# EAGLE board V0p2_Main_PCB2 (EAGLE 7.1.0)
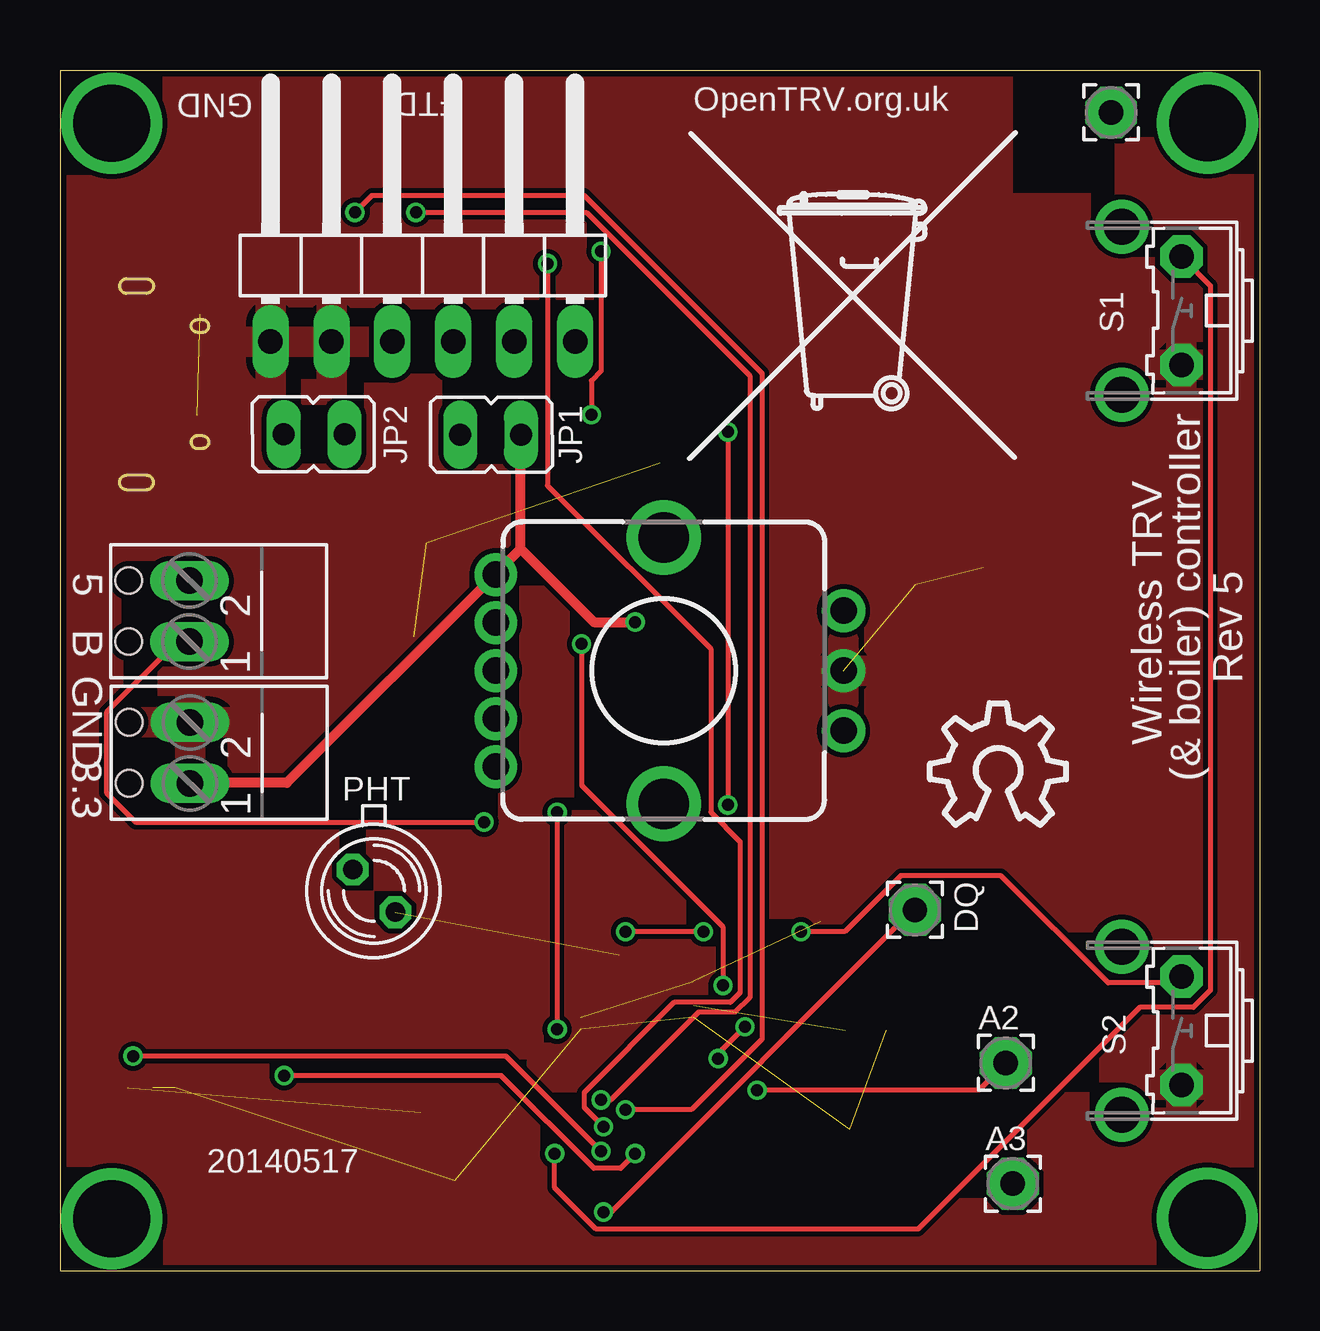
[diagram p0: board, top side]
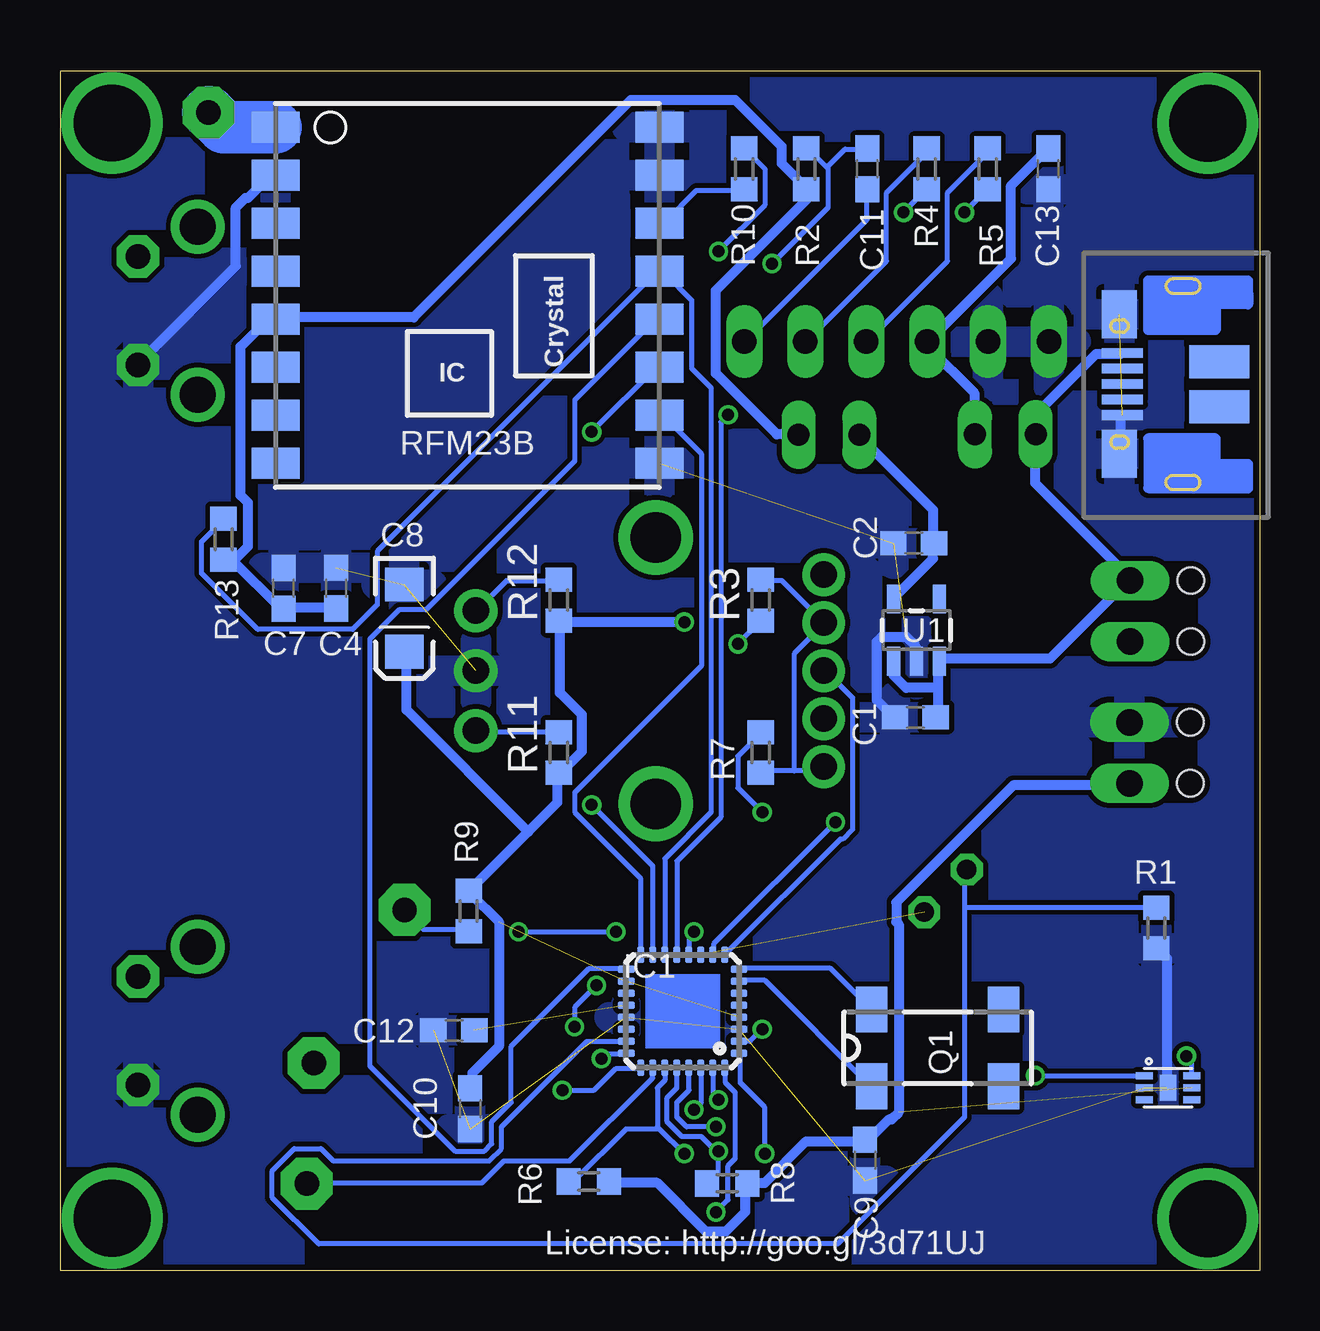
[diagram p1: board, bottom side, seen from below]

Size 50 x 50 mm. Coordinates in mm from the lower left corner, seen from the top.
Outline: 0,0 50,0 50,50 0,50 0,0
Copper layers (1*16): Top 0.035mm / dielectric 1.5mm / Bottom 0.035mm
Design rules "PMServicesStd *": minimum track width 8mil, minimum drill 0.5mm, track to track 8mil, track to pad 8mil, pad to pad 8mil, via to via 8mil, smd to smd 0mil, copper to edge 10mil, drill to drill 10mil, minimum pad ring 10mil, minimum via ring 6mil, stop-mask expansion 2mil, vias tented up to drill 100mil, thermal gap 10mil
Net classes: 0 default: width 0.203 mm; 1 supply: width 0.406 mm, clearance 0.203 mm; 2 ant: width 2.184 mm

## Footprints (pad centres in the part's own frame; a part is rotated, then mirrored left to right if it is on the bottom)
2,15/1,0 = drill 1.016 pad 2.159 octagon: 1 0,0
C0603 = smd 1.1 x 1: 1 -0.85,0; 2 0.85,0
EIA3216 = smd 1.4 x 1.6: A 1.4,0; C -1.4,0
1X06/90 = drill 1.016 long: 1 -6.35,-3.81; 2 -3.81,-3.81; 3 -1.27,-3.81; 4 1.27,-3.81; 5 3.81,-3.81; 6 6.35,-3.81
MLF32 = smd 0.7 x 0.3: 1 -2.35,1.75; 2 -2.35,1.25; 3 -2.35,0.75; 4 -2.35,0.25; 5 -2.35,-0.25; 6 -2.35,-0.75; 7 -2.35,-1.25; 8 -2.35,-1.75; 17 2.35,-1.75; 18 2.35,-1.25; 19 2.35,-0.75; 20 2.35,-0.25; 21 2.35,0.25; 22 2.35,0.75; 23 2.35,1.25; 24 2.35,1.75 | smd 0.3 x 0.7: 9 -1.75,-2.35; 10 -1.25,-2.35; 11 -0.75,-2.35; 12 -0.25,-2.35; 13 0.25,-2.35; 14 0.75,-2.35; 15 1.25,-2.35; 16 1.75,-2.35; 25 1.75,2.35; 26 1.25,2.35; 27 0.75,2.35; 28 0.25,2.35; 29 -0.25,2.35; 30 -0.75,2.35; 31 -1.25,2.35; 32 -1.75,2.35
JP1 = drill 0.914 long: 1 0,-1.27; 2 0,1.27
BPX65 = drill 0.813 octagon: A -0.889,-0.889; K 0.889,0.889
MC-306 = smd 1.3 x 1.9: 1 -2.75,-1.6; 2 2.75,-1.6; 3 2.75,1.6; 4 -2.75,1.6
R0603 = smd 1 x 1.1: 1 -0.85,0; 2 0.85,0
RFM23-XXX-S1 = smd 2 x 1.3: 1 -8,7; 2 -8,5; 3 -8,3; 4 -8,1; 5 -8,-1; 6 -8,-3; 7 -8,-5; 8 -8,-7; 9 8,-7; 10 8,-5; 11 8,-3; 12 8,-1; 13 8,1; 14 8,3; 15 8,5; 16 8,7
B3F-31XX = drill 1.016 pad 1.778 octagon: 1 -2.261,-1.245; 2 2.261,-1.245 | drill 1.499 pad 2.032: 3 -3.505,1.245; 4 3.505,1.245
ENCODER_LED_3 = drill 1.1 pad 1.778: 1 -4,7; 2 -2,7; 3 0,7; 4 2,7; 5 4,7 | drill 1.1 pad 1.8: A -2.5,-7.5; B 2.5,-7.5; C 0,-7.5 | drill 2.1: M1 -5.55,0; M2 5.55,0
TC1185 = smd 0.55 x 1.2: 1 -0.95,-1.3; 2 0,-1.3; 3 0.95,-1.3; 4 0.95,1.3; 5 -0.95,1.3
SHT21 = smd 0.28 x 0.7: 1 -0.5,-0.988; 2 0,-0.988; 3 0.5,-0.988; 4 0.5,0.988; 5 0,0.988; 6 -0.5,0.988 | smd 1.1 x 0.7: P$1 0,0
MICRO-USB-FCI-10103592 = smd 0.4 x 1.71: 1 3.84,2.51; 2 3.19,2.51; 3 2.54,2.51; 4 1.89,2.51; 5 1.24,2.51 | smd 2 x 1.46: 7 -0.36,2.64; 17 5.44,2.64 | smd 1.375 x 2.5: 11 1.603,-1.52; 12 3.478,-1.52
SCREWTERMINAL = drill 1.1 long: 1 -1.27,-1.27; 2 1.27,-1.27 | hole 1.1: -1.27,1.27; 1.27,1.27

## Placement (x,y rotation side)
A2  [2,15/1,0]  39.42,8.66 0 top
A3  [2,15/1,0]  39.72,3.63 0 top
ANT1  ANT (86 mm)  [2,15/1,0]  43.81,48.26 0 top
C1  10uF 10V  [C0603]  14.35,23.06 180 bottom
C2  10uF 10V  [C0603]  14.41,30.31 0 bottom
C4  100pF  [C0603]  38.49,28.44 270 bottom
C7  100nF  [C0603]  40.69,28.43 90 bottom
C8  100uF  [EIA3216]  35.65,27.19 270 bottom
C9  100nF  [C0603]  16.44,4.6 270 bottom
C10  100nF  [C0603]  32.91,6.75 270 bottom
C11  100nF  [C0603]  16.35,45.91 270 bottom
C12  100nF  [C0603]  33.58,10.02 180 bottom
C13  10uF 10V  [C0603]  8.8,45.91 90 bottom
DQ  [2,15/1,0]  35.64,15.03 0 top
FTDI  [1X06/90]  15.12,42.52 0 top
IC1  ATMEGA328-AU  [MLF32]  24.05,10.81 180 bottom
JP1  [JP1]  17.95,34.83 270 top
JP2  [JP1]  10.59,34.85 90 top
PHT  BPX65  [BPX65]  13.09,15.82 270 top
Q1  32768Hz  [MC-306]  13.41,9.28 0 bottom
R1  100K  [R0603]  4.3,14.28 270 bottom
R2  10K  [R0603]  18.89,45.91 90 bottom
R3  470R  [R0603]  20.79,27.94 90 bottom
R4  10K  [R0603]  13.87,45.91 90 bottom
R5  10K  [R0603]  11.33,45.91 90 bottom
R6  4K7  [R0603]  27.96,3.71 180 bottom
R7  470R  [R0603]  20.79,21.59 270 bottom
R8  4K7  [R0603]  22.19,3.63 0 bottom
R9  4.7K  [R0603]  32.96,14.99 90 bottom
R10  1K  [R0603]  21.48,45.91 270 bottom
R11  10K  [R0603]  29.21,21.59 90 bottom
R12  10K  [R0603]  29.21,27.94 90 bottom
R13  47K  [R0603]  43.18,30.48 270 bottom
RFM23B  RFM23B  [RFM23-XXX-S1]  33.02,40.64 0 bottom
S1  [B3F-31XX]  45.5,40 90 top
S2  [B3F-31XX]  45.5,10 90 top
SW1  [ENCODER_LED_3]  25.16,25 90 top
U1  TC1185SMD  [TC1185]  14.3,26.69 0 bottom
U$1  [OSHW_10X200_NOTEXT]  36.26,18.57 0 top
U$2  [TONNE]  32.88,37.88 0 top
U$4  SHT21  [SHT21]  3.81,7.62 270 bottom
USBPOWER  MICRO-USB-FCI-10103592  [MICRO-USB-FCI-10103592]  3.2,34.4 90 bottom
X1  [SCREWTERMINAL]  4.13,27.48 90 top
X2  [SCREWTERMINAL]  4.15,21.57 90 top

## Library data of the parts
A2 A3 ANT1 DQ = wirepad
C1 C2 C4 C7 C9-C13 R1-R13 = resistor
C8 = SparkFun-Passives
FTDI = pinhead
IC1 = Arduino-AVR
JP1 JP2 = jumper
PHT = opto-trans-siemens; MPN: BPX65.; OC_FARNELL: 327451; OC_NEWARK: 06WX2764
Q1 = crystal; MPN: MC-306 60.0KHZ 100PPM ,12.5PF; OC_FARNELL: 1278040; OC_NEWARK: 31M5576
RFM23B = SparkFun-RF
S1 S2 = adafruit
SW1 = SparkFun-Electromechanical
U1 = 3.3VREG
U$1 = ohw-logo
U$2 = logo
U$4 = SHT21
USBPOWER = micro-usb-fci-10103592
X1 X2 = screwterminal; MPN: 237-102; OC_FARNELL: unknown; OC_NEWARK: 70K9898

## Nets
5V [supply]: C1.1 JP2.2 U1.1 U1.3 USBPOWER.1 X1.2
BOILER: IC1.10 X1.1
BUTTON_LEARN2_L: IC1.1 S1.2
BUTTON_LEARN_L: IC1.12 S2.2
BUTTON_MODE_L: IC1.9 SW1.3
D2: DQ.1 IC1.32 R9.1
ENC_A: R11.2 SW1.A
ENC_B: R12.2 SW1.B
GND [supply]: C1.2 C2.1 C4.1 C7.2 C8.C C9.2 C10.2 C12.2 C13.1 FTDI.1 FTDI.2 IC1.3 IC1.21 R1.2 RFM23B.2 RFM23B.9 RFM23B.15 RFM23B.16 S1.1 S2.1 SW1.C U1.2 U$4.2 U$4.P$1 USBPOWER.5 USBPOWER.7 USBPOWER.17 X2.2
GND2: IC1.5
IO_POWER_UP [supply]: IC1.11 PHT.K
LDR: IC1.23 PHT.A R1.1
LED_HEATCALL_B: IC1.24 R3.1
LED_HEATCALL_R: IC1.2 R7.1
N$1: C11.2 FTDI.6
N$3: FTDI.4 R5.2
N$5: FTDI.5 R4.2
N$6 [supply]: C12.1 IC1.20
N$7: R10.2 RFM23B.14
N$8 [supply]: C2.2 JP1.1 U1.5
N$11 [supply]: C13.2 FTDI.3 JP2.1
N$13: R3.2 R7.2 SW1.1 SW1.4
N$24: A2.1 IC1.25
N$25: A3.1 IC1.26
N$31 [ant]: ANT1.1 RFM23B.1
RESET: C11.1 IC1.29 R2.2
RFM_IRQ: IC1.13 R10.1
RX: IC1.31 R4.1
SCL: IC1.28 R8.1 U$4.6
SDA: IC1.27 R6.2 U$4.1
SPI_MISO: IC1.16 RFM23B.10
SPI_MOSI: IC1.15 RFM23B.11
SPI_NSS: IC1.14 R13.1 RFM23B.13
SPI_SCK: IC1.17 RFM23B.12
TX: IC1.30 R5.1
VCC [supply]: C4.2 C7.1 C8.A C9.1 C10.1 IC1.4 IC1.18 JP1.2 R2.1 R6.1 R8.2 R9.2 R11.1 R12.1 R13.2 RFM23B.5 SW1.5 U$4.5 X2.1
VCC2: IC1.6
XTAL1: IC1.7 Q1.1
XTAL2: IC1.8 Q1.4

## Tracks (layer width: path | path; a pad name or v marks a point on that pad's centre or on a via)
5V
  Bottom 0.406: USBPOWER.1 5.79,38.2 6.81,38.2 9.25,35.76 9.25,34.85 JP2.2 9.35,34.65 9.35,32.82 5.49,28.96 X1.2 5.49,28.75 8.74,25.5 13.21,25.5 U1.3 13.41,25.3 13.41,24.28 | 13.41,24.28 13.41,23.06 C1.1 | 13.41,24.28 14.73,24.28 15.24,24.79 15.24,25.3 U1.1
BOILER  (via drill 0.5)
  Top 0.203: v17.68,18.69 3.15,18.69 1.93,19.91 1.93,23.27 4.88,26.21 5.38,26.21 X1.1
  Bottom 0.203: v17.68,18.69 22.76,13.61 22.76,13.21 IC1.10
BUTTON_LEARN2_L  (via drill 0.5)
  Top 0.203: v20.62,4.88 20.62,3.45 22.35,1.73 35.76,1.73 45.01,10.97 47.24,10.97 47.95,11.68 47.95,41.05 46.84,42.16 S1.2
  Bottom 0.203: v20.62,4.88 20.62,6.81 21.64,7.82 21.64,9.04 IC1.1
BUTTON_LEARN_L  (via drill 0.5)
  Top 0.203: v26.82,14.12 v23.57,14.12 | v30.89,14.12 32.72,14.12 35.05,16.46 39.22,16.46 43.69,11.99 46.53,11.99 46.74,12.19 S2.2
  Bottom 0.203: v23.57,14.12 23.77,13.92 23.77,13.21 IC1.12 | v30.89,14.12 v26.82,14.12
BUTTON_MODE_L
  Bottom 0.203: IC1.9 22.25,13.21 17.48,17.98 17.37,17.98 16.97,18.39 16.97,23.88 18.09,24.99 SW1.3
D2  (via drill 0.5)
  Top 0.203: v22.66,2.44 22.96,2.44 35.56,15.04 DQ.1
  Bottom 0.203: v22.66,2.44 22.15,2.95 22.15,4.37 21.84,4.67 21.84,7.42 22.25,7.82 22.25,8.43 IC1.32 | R9.1 33.02,14.22 34.85,14.22 35.56,14.94 DQ.1
ENC_A
  Bottom 0.203: R11.2 29.26,22.45 32.61,22.45 SW1.A
ENC_B
  Bottom 0.203: R12.2 29.26,28.75 31.39,28.75 32.61,27.53 SW1.B
GND  (11 unrouted)
  Bottom 0.406: 41.05,45.62 RFM23B.2 41.25,45.62 42.16,44.7 42.27,44.7 42.67,44.3 42.67,41.86 46.74,37.8 S1.1 | U$4.P$1 3.86,7.62 3.86,13.01 4.27,13.41 R1.2 | U1.2 14.33,25.4 14.33,26.01 14.73,26.42 15.75,26.42 15.95,26.21 15.95,23.77 15.24,23.06 C1.2 | USBPOWER.5 5.79,35.56 5.79,34.14 USBPOWER.7
  pour Bottom: 0,0 50,0 50,50 44.6,50 44.6,44.28 39.09,44.27 39.09,50 0,50
  pour Top: 0,50 0,0 50,0 50,50 44.6,50 44.6,44.28 39.09,44.27 39.09,50
IO_POWER_UP  (1 unrouted)
LDR
  Bottom 0.203: 12.29,15.14 12.29,16.66 PHT.A | 12.29,15.14 12.29,6.4 17.58,1.12 39.22,1.12 41.15,3.05 41.15,4.17 40.23,5.08 39.12,5.08 38.61,4.57 32.11,4.57 31.6,5.08 31.6,5.99 28.04,9.55 26.42,9.55 IC1.23 | 12.29,15.14 4.37,15.14 R1.1
LED_HEATCALL_B  (via drill 0.5)
  Top 0.203: v27.43,8.84 27.43,9.04 v28.55,10.16 | v27.64,11.89 27.64,14.33 21.74,20.22 v21.74,26.11
  Bottom 0.203: v27.43,8.84 27.23,9.04 26.42,9.04 IC1.24 | v28.55,10.16 28.55,10.97 v27.64,11.89 | v21.74,26.11 20.83,27.03 R3.1
LED_HEATCALL_R  (via drill 0.5)
  Top 0.203: v20.73,19.1 v20.73,10.06
  Bottom 0.203: v20.73,10.06 21.23,9.55 21.64,9.55 IC1.2 | v20.73,19.1 21.74,20.12 21.74,21.44 20.83,22.35 R7.1
N$1
  Bottom 0.203: C11.2 16.36,45.01 16.36,43.79 21.44,38.71 FTDI.6
N$3
  Bottom 0.203: R5.2 11.38,46.74 11.38,46.53 13.01,44.91 13.01,42.06 16.36,38.71 FTDI.4
N$4  (via drill 3.2)
  other vias: 2.16,47.81
N$5
  Bottom 0.203: R4.2 13.92,46.74 13.92,46.53 15.54,44.91 15.54,42.06 18.9,38.71 FTDI.5
N$6  (1 unrouted)
N$7
  Bottom 0.203: R10.2 21.54,45.01 23.47,45.01 24.79,43.69 24.99,43.69 RFM23B.14
N$8
  Bottom 0.406: U1.5 15.24,28.04 13.61,29.67 13.61,30.28 C2.2 13.61,30.48 13.61,31.7 16.66,34.75 JP1.1
N$11
  Bottom 0.406: C13.2 8.84,46.74 10.36,45.21 10.36,42.16 13.82,38.71 FTDI.3 13.82,38.51 11.89,36.58 11.89,34.85 JP2.1
N$12  (via drill 3.2)
  other vias: 47.83,2.19
N$13
  Bottom 0.203: 19.41,20.83 18.29,20.83 18.19,20.93 SW1.1 | 19.41,20.83 20.73,20.83 R7.2 | R3.2 20.73,28.75 19.91,28.75 18.19,27.03 SW1.4 18.19,26.92 19.41,25.7 19.41,20.83
N$19  (via drill 3.2)
  other vias: 47.83,47.82
N$22  (via drill 3.2)
  other vias: 2.16,2.16
N$24  (via drill 0.5)
  Top 0.203: v29.06,7.52 38.3,7.52 39.42,8.64 A2.1
  Bottom 0.203: v29.06,7.52 27.74,7.52 26.82,8.43 25.81,8.43 IC1.25
N$25
  Bottom 0.203: IC1.26 25.3,8.43 25.3,8.03 28.75,4.57 31.5,4.57 32.41,3.66 39.62,3.66 A3.1
N$31
  Bottom 2.184: RFM23B.1 41.05,47.65 43.18,47.65 43.79,48.26 ANT1.1
RESET  (via drill 0.5)
  Top 0.203: v22.66,5.99 21.84,6.81 21.84,7.42 25.6,11.18 27.94,11.18 28.35,11.58 28.35,17.88 27.13,19.1 27.13,25.91 20.32,32.72 v20.32,41.96
  Bottom 0.203: v22.66,5.99 23.88,5.99 24.28,6.4 24.28,7.01 23.77,7.52 23.77,8.43 IC1.29 | v20.32,41.96 17.98,44.3 17.98,45.92 18.03,45.97 | 18.03,45.97 18.8,46.74 R2.2 | 18.03,45.97 17.27,46.74 16.36,46.74 C11.1
RFM_IRQ  (via drill 0.5)
  Top 0.203: v22.15,35.66 22.15,37.08 22.55,37.49 v22.55,42.47
  Bottom 0.203: v22.15,35.66 22.45,35.36 22.45,18.9 24.28,17.07 24.28,13.21 IC1.13 | v22.55,42.47 20.62,44.4 20.62,45.92 21.44,46.74 R10.1
RX  (via drill 0.5)
  Top 0.203: v22.55,7.11 22.96,7.11 26.62,10.77 28.14,10.77 28.75,11.38 28.75,37.29 21.95,44.09 v14.83,44.09
  Bottom 0.203: v22.55,7.11 22.76,7.32 22.76,8.43 IC1.31 | v14.83,44.09 13.92,45.01 R4.1
SCL  (via drill 0.5)
  Top 0.203: v3.05,8.94 18.59,8.94 v22.55,4.98
  Bottom 0.203: v3.05,8.94 2.85,8.74 2.85,8.13 U$4.6 | 22.55,4.88 22.55,4.06 22.96,3.66 R8.1 | 22.55,4.88 23.27,5.59 24.08,5.59 24.69,6.2 24.69,7.21 24.28,7.62 24.28,8.43 IC1.28 | 22.55,4.88 v22.55,4.98
SDA  (via drill 0.5)
  Top 0.203: v9.35,8.13 18.39,8.13 22.25,4.27 23.37,4.27 v23.98,4.88
  Bottom 0.203: v9.35,8.13 4.88,8.13 U$4.1 | 25.04,5.94 25.09,5.99 25.09,7.62 24.79,7.92 24.79,8.43 IC1.27 | 25.04,5.94 v23.98,4.88 | R6.2 28.75,3.76 28.55,3.76 26.42,5.89 25.09,5.89 25.04,5.94
SPI_MISO
  Bottom 0.203: IC1.16 25.81,13.21 25.81,16.36 28.55,19.1 28.55,19.91 23.27,25.2 23.27,34.04 24.79,35.56 24.99,35.56 RFM23B.10
SPI_MOSI  (via drill 0.5)
  Top 0.203: v27.84,34.95 v27.84,19.41
  Bottom 0.203: v27.84,19.41 25.3,16.87 25.3,13.21 IC1.15 | v27.84,34.95 25.09,37.69 RFM23B.11
SPI_NSS
  Bottom 0.203: IC1.14 24.79,13.21 24.79,17.17 22.86,19.1 22.86,36.78 23.67,37.59 23.67,40.44 24.79,41.55 24.99,41.55 RFM23B.13 25.09,41.66 36.78,29.97 36.78,27.74 37.8,26.72 41.76,26.72 44.09,29.06 44.09,30.38 43.18,31.29 R13.1
SPI_SCK
  Bottom 0.203: IC1.17 26.42,12.6 27.94,12.6 31.19,9.35 31.19,7.01 32,6.2 32,5.28 32.31,4.98 33.53,4.98 37.08,8.53 37.08,26.31 35.87,27.53 34.75,27.53 28.55,33.73 28.55,36.27 25.09,39.73 RFM23B.12
TX  (via drill 0.5)
  Top 0.203: v23.57,6.71 26.31,6.71 29.26,9.65 29.26,37.39 21.84,44.81 13.01,44.81 v12.29,44.09
  Bottom 0.203: v23.57,6.71 23.27,7.01 23.27,8.43 IC1.30 | v12.29,44.09 11.38,45.01 R5.1
VCC  (via drill 0.5)  (3 unrouted)
  Top 0.406: X2.1 5.49,20.32 9.45,20.32 18.09,28.96 SW1.5 18.29,29.16 19.2,30.07 | 19.2,30.07 19.2,34.75 JP1.2 | v23.98,27.03 22.25,27.03 19.2,30.07
  Bottom 0.406: C10.1 32.82,7.62 32.82,8.23 31.7,9.35 31.7,14.53 32.92,15.75 R9.2 32.82,15.95 30.48,18.29 | 30.48,18.29 29.26,19.51 29.26,20.73 R11.1 29.06,20.83 28.25,21.64 28.25,23.16 29.16,24.08 29.16,27.03 R12.1 28.96,27.03 v23.98,27.03 | 30.48,18.29 35.56,23.37 35.56,25.7 C8.A | C4.2 38.51,27.64 40.64,27.64 C7.1 40.84,27.64 42.77,29.57 43.18,29.57 R13.2 42.67,29.67 42.16,30.18 42.16,32 42.47,32.31 42.47,38.51 41.35,39.62 41.05,39.62 RFM23B.5 40.84,39.73 35.26,39.73 26.21,48.77 21.84,48.77 19.91,46.84 19.91,46.13 19,45.21 R2.1 18.9,45.01 18.9,44.6 22.66,40.84 22.66,37.39 20.12,34.85 19.3,34.85 JP1.2 | R6.1 27.03,3.66 25.09,3.66 23.06,1.63 22.25,1.63 21.44,2.44 21.44,3.45 R8.2 21.34,3.66 20.62,3.66 18.9,5.38 16.46,5.38 C9.1 16.26,5.49 15.44,6.3 15.34,6.3 15.04,6.6 15.04,14.43 15.14,14.53 15.14,15.34 10.26,20.22 5.49,20.22 X2.1
XTAL1
  Bottom 0.203: IC1.7 21.64,12.09 20.62,12.09 16.26,7.72 Q1.1
XTAL2
  Bottom 0.203: IC1.8 21.64,12.6 17.88,12.6 16.26,10.97 Q1.4

## Text on the board
bPlace: License: http://goo.gl/3d71UJ
tNames: GND | OpenTRV.org.uk | (& boiler) controller | Wireless TRV | 5 | Rev 5 | B | GND | 3.3 | 20140517